# Altium PCB 2017核心板v3.0.PcbDoc (part 2 of 2)
Units mil, origin at the board's own origin, x right, y up, seen from the top; angles counter-clockwise.
Board outline 2660.2 x 2023.11 mil, 2 copper layers (Top Layer, Bottom Layer); 56 components, 128 nets, 399 pads, 43 vias.
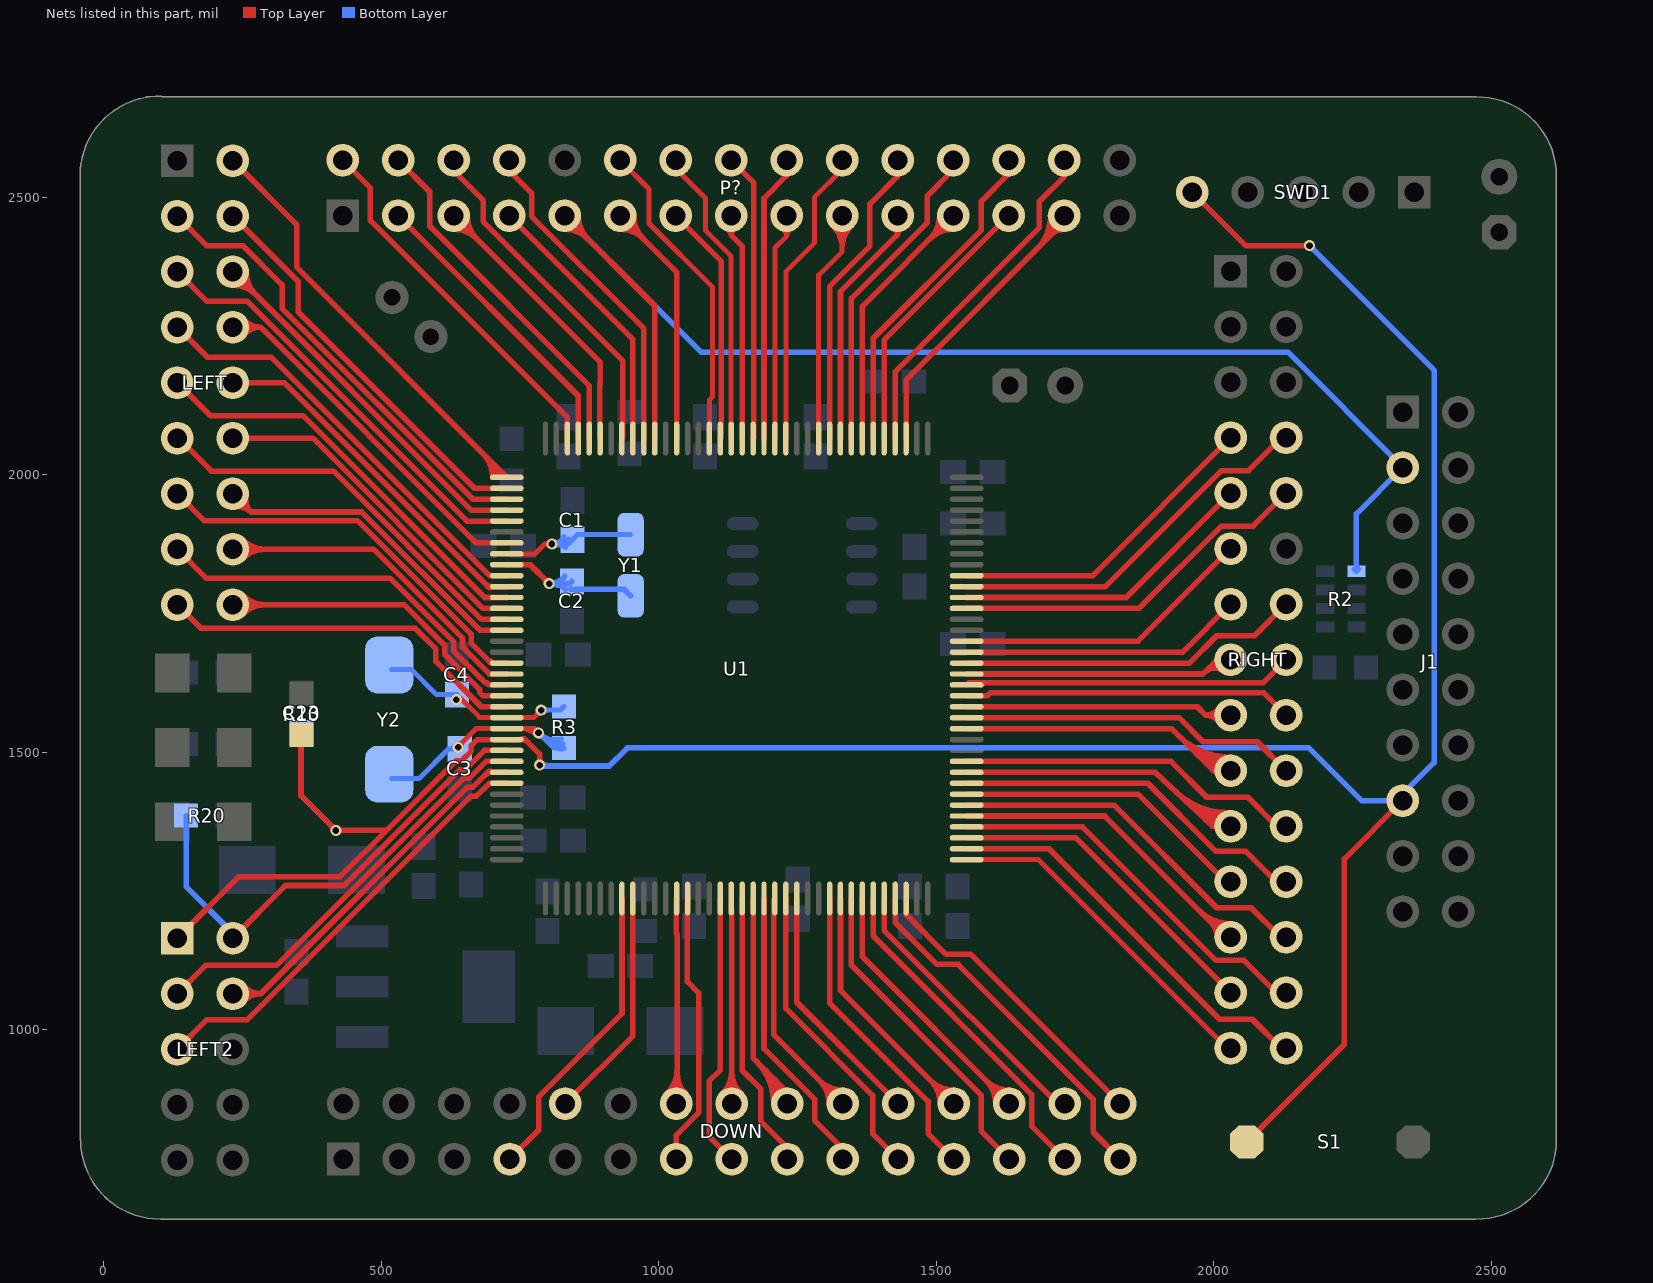
[diagram p2: the nets of this part, all layers, seen from the top]

## Via types
v1: diameter 20, hole 12, Top Layer to Bottom Layer, 43 vias

## Nets (pads, with @x,y where several pads share a name; then routed paths per layer and width w, separated by ;. In a path a pad name is that pad's centre, name@x,y a point inside that pad or via, vN(x,y) a via of type N, cw(c..) or ccw(c..) an arc to the next point about the centre after c; other vN are vias at no path point) (continued)
PB4: J1.3 P?.9 R2.7 U1.134 | length 2556.1
  Top Layer w10: P?.9@830,2442.47 cw(c830,2383.26) 871.87,2425.13 cw(c913.74,2467) P?.9@854.53,2467 ; P?.9@830,2452.47 cw(c830,2417.4) 854.8,2442.2 cw(c879.6,2467) P?.9@844.53,2467 ; P?.9@830,2467 992.36,2304.64 U1.134@992.36,2065.37
  Bottom Layer w10: P?.9@830,2467 1076,2221 2133.29,2221 2340,2014.29 J1.3@2340,2013 2256.61,1929.61 R2.7@2256.61,1826.2 ; R2.7@2253.07,1829.73 ccw(c2244.54,1838.27) 2256.61,1838.27 ccw(c2268.68,1838.27) R2.7@2260.14,1829.73
PB5: P?.8 U1.135 | length 602.2
  Top Layer w10: P?.8@730,2567 730,2548.02 770.51,2507.51 770.51,2465.49 972.68,2263.32 U1.135@972.68,2065.37
PB6: P?.7 U1.136 | length 494
  Top Layer w10: P?.7@730,2467 952.99,2244.01 U1.136@952.99,2065.37
PB7: P?.6 U1.137 | length 628.7
  Top Layer w10: P?.6@630,2567 630,2548.02 683,2495.02 683,2456.71 934.98,2204.72 934.98,2067.05 U1.137@933.31,2065.37
PB8: P?.5 U1.139 | length 659.8
  Top Layer w10: P?.5@630,2442.47 cw(c630,2383.26) 671.87,2425.13 cw(c713.74,2467) P?.5@654.53,2467 ; P?.5@630,2452.47 cw(c630,2417.4) 654.8,2442.2 cw(c679.6,2467) P?.5@644.53,2467 ; P?.5@630,2467 893.94,2203.06 893.94,2163.75 893.02,2162.83 893.02,2066.29 U1.139@893.94,2065.37
PB9: P?.4 U1.140 | length 644.2
  Top Layer w10: P?.4@530,2567 587,2510 587,2448 874.25,2160.75 U1.140@874.25,2065.37
PB10: DOWN.29 U1.69 | length 659.9
  Top Layer w10: U1.69@1425.43,1236.63 1425.43,1193.57 1501,1118 1539,1118 1782.5,874.5 1782.5,815.5 DOWN.29@1831,767
PB11: DOWN.30 U1.70 | length 560.8
  Top Layer w10: U1.70@1445.04,1211.04 ccw(c1451.63,1211.04) 1446.97,1206.38 ; U1.70@1445.12,1236.63 1445.12,1208.23 1517.35,1136 1562,1136 DOWN.30@1831,867
PB12: RIGHT.29 U1.73 | length 614.2
  Top Layer w9: U1.73@1554.37,1306.51 1683.51,1306.51 ; 1684,1306 RIGHT.29@2027,963
PB13: RIGHT.30 U1.74 | length 724.4
  Top Layer w10: U1.74@1554.37,1326.2 1702.8,1326.2 2010,1019 2069,1019 2121,967 RIGHT.30@2130,967
PB14: RIGHT.27 U1.75 | length 591.1
  Top Layer w10: U1.75@1554.37,1345.88 1751.12,1345.88 RIGHT.27@2030,1067
PB15: RIGHT.28 U1.76 | length 699.3
  Top Layer w10: U1.76@1554.37,1365.57 1763.43,1365.57 2004,1125 2054,1125 2112,1067 RIGHT.28@2130,1067
PC0: LEFT2.2 R20.1 U1.26 | length 889.6
  Top Layer w10: LEFT2.2@232,1165 327.02,1260.02 432.2,1260.02 641.08,1468.9 651.09,1468.9 685.55,1503.36 U1.26@725.63,1503.36
  Bottom Layer w10: R20.1@148,1386 148,1258 232,1174 LEFT2.2@232,1165
PC1: LEFT2.3 U1.27 | length 767.1
  Top Layer w10: LEFT2.3@132,1065 183,1116 310.79,1116 647.7,1452.91 657.71,1452.91 688.47,1483.68 U1.27@725.63,1483.68
PC2: LEFT2.4 U1.28 | length 798.8
  Top Layer w10: LEFT2.4@232,1065 282.39,1065 ; LEFT2.4@243.43,1056.04 cw(c261.85,1041.6) 261.85,1065 cw(c261.85,1088.4) LEFT2.4@243.43,1073.96 ; LEFT2.4@251.3,1049.87 cw(c282.39,1025.5) 282.39,1065 ; LEFT2.4@251.3,1080.13 ccw(c282.39,1104.5) 282.39,1065 ; 685.41,1458.01 cw(c700.04,1443.38) U1.28@700.04,1464.07 ; U1.28@700.09,1464.05 ccw(c695.77,1459.61) 691.39,1463.99 ; U1.28@725.63,1463.99 691.39,1463.99 ; 282.39,1065 654.32,1436.93 664.33,1436.93 691.39,1463.99
PC3: LEFT2.5 U1.29 | length 802.9
  Top Layer w10: LEFT2.5@132,965 185,1018 258,1018 660.94,1420.94 670.95,1420.94 694.31,1444.31 U1.29@725.63,1444.31 ; 690.39,1440.39 cw(c700.04,1430.75) U1.29@700.04,1444.39
PC4: DOWN.7 U1.44 | length 553.4
  Top Layer w10: DOWN.7@731,767 783,819 783,879 933.31,1029.31 U1.44@933.31,1236.63
PC5: DOWN.10 U1.45 | length 420.2
  Top Layer w10: DOWN.10@831,867 952.99,988.99 U1.45@952.99,1236.63
PC6: RIGHT.10 U1.96 | length 657.4
  Top Layer w10: U1.96@1554.37,1759.27 1864.98,1759.27 ; 1867.98,1762.27 2013.22,1907.51 2070.51,1907.51 RIGHT.10@2130,1967
PC7: RIGHT.9 U1.97 | length 553.5
  Top Layer w10: U1.97@1554.37,1778.95 1841.95,1778.95 RIGHT.9@2030,1967
PC8: RIGHT.8 U1.98 | length 682.5
  Top Layer w10: U1.98@1554.37,1798.64 1804.35,1798.64 ; 1807.35,1801.64 2013.22,2007.51 2062.51,2007.51 2122,2067 RIGHT.8@2130,2067
PC9: RIGHT.7 U1.99 | length 574.4
  Top Layer w10: U1.99@1554.37,1818.32 1781.32,1818.32 ; 1784.32,1821.32 RIGHT.7@2030,2067
PC10: P?.27 U1.111 | length 690.5
  Top Layer w10: U1.111@1445.12,2065.37 1445.12,2171.12 1730,2456 P?.27@1730,2467 ; 1680.35,2406.35 ccw(c1619.7,2467) P?.27@1705.47,2467 ; 1697.42,2423.42 ccw(c1653.84,2467) P?.27@1715.47,2467 ; 1706.91,2432.91 cw(c1730,2409.81) P?.27@1730,2442.47 ; 1714.49,2440.49 ccw(c1687.99,2467) P?.27@1725.47,2467
PC11: P?.28 U1.112 | length 644.5
  Top Layer w10: U1.112@1425.43,2065.37 1425.43,2185.43 1685,2445 1685,2492 1730,2537 ; P?.28@1725.13,2542.96 cw(c1723.92,2537) 1730,2537 ; P?.28@1730,2567 1730,2537 ; P?.28@1734.87,2542.96 ccw(c1736.08,2537) 1730,2537
PC12: P?.25 U1.113 | length 494.5
  Top Layer w10: U1.113@1405.75,2065.37 1405.75,2242.75 P?.25@1630,2467
PC13: LEFT.8 U1.7 | length 767
  Top Layer w10: LEFT.8@232,2266 282,2266 ; LEFT.8@243.49,2257.11 cw(c261.61,2243.08) 261.61,2266 cw(c261.61,2288.92) LEFT.8@243.49,2274.89 ; LEFT.8@251.4,2250.99 cw(c282,2227.31) 282,2266 ; LEFT.8@251.4,2281.01 ccw(c282,2304.69) 282,2266 ; U1.7@725.63,1877.38 670.62,1877.38 282,2266
PC14: C1.2 U1.8 Y1.2 | length 376.7
  Top Layer w9: U1.8@725.63,1857.69 776.69,1857.69 794.26,1875.26 ; v1@803,1871.49 ccw(c794.26,1863.26) 794.26,1875.26 ; v1@803,1879.03 cw(c794.26,1887.26) 794.26,1875.26 ; v1@810.74,1875.26 v1(807,1875.26) 794.26,1875.26
  Bottom Layer w9: v1@809.97,1879.89 ccw(c816.09,1889.45) 819.03,1878.48 ccw(c821.97,1867.52) v1@811.89,1872.73 ; v1@810.4,1870.93 cw(c819.42,1859.44) C1.2@823.21,1873.56 ; v1@810.89,1871.37 cw(c820.28,1861.98) 820.28,1875.26 cw(c820.28,1888.54) v1@810.89,1879.15 ; v1@816.85,1875.26 cw(c816.85,1854.01) C1.2@831.87,1869.04 ; 821.44,1875.26 ccw(c821.44,1892.23) C1.2@836.68,1884.76 ; C1.2@828.6,1888.72 cw(c807,1899.32) v1(807,1875.26) 836.13,1875.26 C1.2@844,1883.13 852.98,1892.12 Y1.2@949,1892.12
PC15: C2.2 U1.9 Y1.1 | length 356.2
  Top Layer w10: U1.9@725.63,1838.01 767.99,1838.01 v1(802,1804) v1@801.63,1804 ; v1@797,1804 ccw(c784.93,1804) 793.46,1812.54 ccw(c802,1821.07) v1@802,1809
  Bottom Layer w10: v1@804.5,1799.67 cw(c812.91,1785.1) 817.26,1801.35 ; v1@805.54,1800.46 cw(c814.07,1791.93) 814.07,1804 cw(c814.07,1816.07) v1@805.54,1807.54 ; v1@807.38,1804 cw(c807.38,1770.27) C2.2@831.22,1794.12 ; C2.2@830.49,1816.89 cw(c802,1841.93) v1(802,1804) 839.13,1804 C2.2@843,1807.87 ; C2.2@841,1793.87 937.02,1793.87 Y1.1@949,1781.88
PD0: P?.26 U1.114 | length 602.7
  Top Layer w10: U1.114@1386.06,2065.37 1386.06,2246.06 1581,2441 1581,2493 1630,2542 P?.26@1630,2567
PD1: P?.23 U1.115 | length 617.5
  Top Layer w10: U1.115@1366.38,2065.37 1366.38,2303.38 P?.23@1530,2467 ; P?.23@1505.47,2467 cw(c1446.26,2467) 1488.13,2425.13 cw(c1530,2383.26) P?.23@1530,2442.47 ; P?.23@1515.47,2467 cw(c1480.4,2467) 1505.2,2442.2 cw(c1530,2417.4) P?.23@1530,2452.47
PD2: P?.24 U1.116 | length 577.6
  Top Layer w10: U1.116@1346.69,2065.37 1346.69,2317.69 1483,2454 1483,2502 1530,2549 P?.24@1530,2567
PD3: P?.21 U1.117 | length 472.5
  Top Layer w10: U1.117@1327.01,2065.37 1327.01,2330.01 1430,2433 ; P?.21@1422.26,2443.72 cw(c1418.7,2433) 1430,2433 ; P?.21@1430,2467 1430,2433 ; P?.21@1437.74,2443.72 ccw(c1441.3,2433) 1430,2433
PD4: P?.22 U1.118 | length 552.4
  Top Layer w10: U1.118@1307.32,2065.37 1307.32,2339.32 1380,2412 1380,2488 1430,2538 P?.22@1430,2567
PD5: P?.19 U1.119 | length 574.9
  Top Layer w9: U1.119@1287.64,2065.37 1287.64,2359.64 1330,2402 P?.19@1330,2467 ; P?.19@1312.3,2449.3 cw(c1269.58,2406.58) 1330,2406.58 cw(c1390.42,2406.58) P?.19@1347.7,2449.3 ; P?.19@1318.67,2455.67 cw(c1291.31,2428.31) 1330,2428.31 cw(c1368.69,2428.31) P?.19@1341.33,2455.67
PD6: P?.20 U1.122 | length 543.6
  Top Layer w9: U1.122@1228.58,2065.37 1228.58,2365.96 1280,2417.38 1280,2500 1330,2550 P?.20@1330,2567
PD7: P?.17 U1.123 | length 445.7
  Top Layer w9: U1.123@1208.9,2065.37 1208.9,2408.9 1230,2430 ; P?.17@1220.69,2443.77 cw(c1215.17,2430) 1230,2430 ; P?.17@1230,2467 1230,2430 ; P?.17@1239.31,2443.77 ccw(c1244.83,2430) 1230,2430
PD8: RIGHT.25 U1.77 | length 703.7
  Top Layer w10: U1.77@1554.37,1385.25 1802.75,1385.25 2021,1167 RIGHT.25@2030,1167 ; 1972.77,1215.24 ccw(c2030,1272.47) RIGHT.25@2030,1191.53 ; 1989.84,1198.16 ccw(c2030,1238.33) RIGHT.25@2030,1181.53 ; 1994.49,1193.51 cw(c1967.99,1167) RIGHT.25@2005.47,1167
PD9: RIGHT.26 U1.78 | length 674.2
  Top Layer w10: U1.78@1554.37,1404.94 1820.06,1404.94 2005,1220 2067,1220 2120,1167 RIGHT.26@2130,1167
PD10: RIGHT.23 U1.79 | length 540.9
  Top Layer w10: U1.79@1554.37,1424.62 1863.38,1424.62 2021,1267 RIGHT.23@2030,1267
PD11: RIGHT.24 U1.80 | length 649.1
  Top Layer w10: U1.80@1554.37,1444.31 1880.69,1444.31 2003,1322 2057,1322 2112,1267 RIGHT.24@2130,1267
PD12: RIGHT.21 U1.81 | length 854.4
  Top Layer w10: U1.81@1554.37,1463.99 1894.01,1463.99 1997,1367 ; 1931.62,1428.57 ccw(c2025.17,1527.91) RIGHT.21@2029.26,1391.52 ; 1949.19,1412.02 ccw(c2026.2,1493.79) RIGHT.21@2029.56,1381.52 ; 1966.77,1395.47 ccw(c2027.22,1459.66) RIGHT.21@2029.86,1371.53 ; 1984.34,1378.92 ccw(c2028.24,1425.53) RIGHT.21@2030.16,1361.53 ; RIGHT.21@2006.51,1359.93 ccw(c1997,1357.07) 1997,1367 ; RIGHT.21@2006.51,1374.07 cw(c1997,1376.93) 1997,1367 ; RIGHT.21@2030,1367 1997,1367
PD13: RIGHT.22 U1.82 | length 624
  Top Layer w10: U1.82@1554.37,1483.68 1922.32,1483.68 1987,1419 2061,1419 2113,1367 RIGHT.22@2130,1367
PD14: RIGHT.19 U1.85 | length 834
  Top Layer w10: U1.85@1554.37,1542.73 1923.27,1542.73 1999,1467 ; 1935.21,1530.79 ccw(c2030,1625.58) RIGHT.19@2030,1491.53 ; 1952.28,1513.72 ccw(c2030,1591.44) RIGHT.19@2030,1481.53 ; 1969.35,1496.65 ccw(c2030,1557.3) RIGHT.19@2030,1471.53 ; 1986.42,1479.58 ccw(c2030,1523.16) RIGHT.19@2030,1461.53 ; RIGHT.19@2006.13,1461.36 ccw(c1999,1459.67) 1999,1467 ; RIGHT.19@2006.13,1472.64 cw(c1999,1474.33) 1999,1467 ; RIGHT.19@2030,1467 1999,1467
PD15: RIGHT.20 U1.86 | length 615.2
  Top Layer w10: U1.86@1554.37,1562.42 1937.02,1562.42 1980.44,1519 2078,1519 RIGHT.20@2130,1467
PE0: P?.3 U1.141 | length 536.1
  Top Layer w10: P?.3@530,2467 854.57,2142.43 U1.141@854.57,2065.37
PE1: P?.2 U1.142 | length 669.3
  Top Layer w10: P?.2@430,2567 480,2517 480,2458 834.88,2103.12 U1.142@834.88,2065.37
PE2: LEFT.2 U1.1 | length 863.2
  Top Layer w10: LEFT.2@232,2566 347,2451 347,2374.12 U1.1@725.63,1995.49 ; 682.08,2039.04 cw(c638.53,1995.49) U1.1@700.12,1995.49 ; 699.15,2021.97 cw(c672.67,1995.49) U1.1@710.12,1995.49 ; 716.22,2004.9 cw(c706.81,1995.49) U1.1@720.12,1995.49
PE3: LEFT.4 U1.2 | length 728.8
  Top Layer w10: LEFT.4@232,2466 350,2348 350,2293.21 667.41,1975.8 U1.2@725.63,1975.8
PE4: LEFT.3 U1.3 | length 829.7
  Top Layer w10: LEFT.3@132,2466 185,2413 250,2413 321,2342 321,2299.61 664.49,1956.12 U1.3@725.63,1956.12
PE5: LEFT.6 U1.4 | length 819.7
  Top Layer w10: LEFT.6@232,2341.47 cw(c232,2282.26) 273.87,2324.13 cw(c315.74,2366) LEFT.6@256.53,2366 ; LEFT.6@232,2351.47 cw(c232,2316.4) 256.8,2341.2 cw(c281.6,2366) LEFT.6@246.53,2366 ; LEFT.6@232,2366 661.57,1936.43 U1.4@725.63,1936.43
PE6: LEFT.5 U1.5 | length 779.7
  Top Layer w10: LEFT.5@132,2366 185,2313 257.61,2313 653.86,1916.75 U1.5@725.63,1916.75
PE7: DOWN.20 U1.58 | length 569.9
  Top Layer w10: U1.58@1208.9,1236.63 1207,1234.73 1207,991 DOWN.20@1331,867 ; DOWN.20@1306.47,867 ccw(c1247.26,867) 1289.13,908.87 ccw(c1331,950.74) DOWN.20@1331,891.53 ; DOWN.20@1316.47,867 ccw(c1281.4,867) 1306.2,891.8 ccw(c1331,916.6) DOWN.20@1331,881.53
PE8: DOWN.21 U1.59 | length 553.5
  Top Layer w10: U1.59@1228.58,1236.63 1228.58,1038.42 1385,882 1385,813 DOWN.21@1431,767
PE9: DOWN.22 U1.60 | length 445.3
  Top Layer w10: U1.60@1248.27,1236.63 1248.27,1049.73 DOWN.22@1431,867
PE10: DOWN.23 U1.63 | length 562.3
  Top Layer w10: U1.63@1307.32,1236.63 1307.32,1048.68 1485,871 1485,813 DOWN.23@1531,767
PE11: DOWN.24 U1.64 | length 602.2
  Top Layer w10: U1.64@1327.01,1236.63 1327.01,1070.99 DOWN.24@1531,867 ; DOWN.24@1506.47,867 ccw(c1447.26,867) 1489.13,908.87 ccw(c1531,950.74) DOWN.24@1531,891.53 ; DOWN.24@1516.47,867 ccw(c1481.4,867) 1506.2,891.8 ccw(c1531,916.6) DOWN.24@1531,881.53
PE12: DOWN.25 U1.65 | length 587.4
  Top Layer w10: U1.65@1346.69,1236.63 1346.69,1116.31 1581,882 1581,817 DOWN.25@1631,767
PE13: DOWN.26 U1.66 | length 627.3
  Top Layer w10: U1.66@1366.38,1236.63 1366.38,1131.62 DOWN.26@1631,867 ; DOWN.26@1606.47,867 ccw(c1547.26,867) 1589.13,908.87 ccw(c1631,950.74) DOWN.26@1631,891.53 ; DOWN.26@1616.47,867 ccw(c1581.4,867) 1606.2,891.8 ccw(c1631,916.6) DOWN.26@1631,881.53
PE14: DOWN.27 U1.67 | length 612.5
  Top Layer w10: U1.67@1386.06,1236.63 1386.06,1169.23 1671.51,883.78 1671.51,826.49 DOWN.27@1731,767
PE15: DOWN.28 U1.68 | length 512
  Top Layer w10: U1.68@1405.75,1236.63 1405.75,1179.25 1718,867 DOWN.28@1731,867
PF0: LEFT.7 U1.10 | length 789.1
  Top Layer w10: LEFT.7@132,2266 186,2212 301,2212 694.68,1818.32 U1.10@725.63,1818.32 ; 691.02,1821.98 ccw(c700.04,1831) U1.10@700.04,1818.24
PF1: LEFT.10 U1.11 | length 670.6
  Top Layer w10: LEFT.10@232,2166 324.39,2166 691.76,1798.64 ; 686.04,1804.36 ccw(c700.04,1818.36) U1.11@700.04,1798.56 ; U1.11@700.09,1798.58 cw(c695.95,1802.84) 691.76,1798.64 ; U1.11@725.63,1798.64 691.76,1798.64
PF2: LEFT.9 U1.12 | length 754
  Top Layer w10: LEFT.9@132,2166 191.49,2106.51 358.49,2106.51 686.05,1778.95 U1.12@725.63,1778.95
PF3: LEFT.12 U1.13 | length 620.7
  Top Layer w10: LEFT.12@232,2066 376.39,2066 683.13,1759.27 U1.13@725.63,1759.27
PF4: LEFT.11 U1.14 | length 728.8
  Top Layer w10: LEFT.11@132,2066 134,2066 193.49,2006.51 413.28,2006.51 680.21,1739.58 U1.14@725.63,1739.58
PF5: LEFT.14 U1.15 | length 657.8
  Top Layer w10: LEFT.14@232,1966 265.02,1932.98 ; LEFT.14@236.44,1941.88 cw(c242.26,1910.24) 265.01,1932.99 ; LEFT.14@256.12,1961.56 ccw(c287.76,1955.74) 265.01,1932.99 ; U1.15@725.63,1719.9 677.29,1719.9 464.2,1932.98 265.02,1932.98
PF6: LEFT.13 U1.18 | length 748
  Top Layer w10: LEFT.13@132,1966 181,1917 457.58,1917 661.94,1712.64 661.94,1696.14 693.45,1664.62 ; U1.18@700.11,1660.88 ccw(c693.45,1656.83) 693.45,1664.62 ; U1.18@725.63,1660.84 699.25,1660.84 695.47,1664.62 693.45,1664.62 ; 695.38,1662.69 ccw(c700.04,1667.35) 700.04,1660.76 cw(c700.04,1667.35) 695.38,1662.69
PF7: LEFT.16 U1.19 | length 755.2
  Top Layer w10: LEFT.16@232,1866 485.97,1866 645.95,1706.02 645.95,1689.52 694.31,1641.16 U1.19@725.63,1641.16 ; LEFT.16@242.27,1855.73 cw(c267.07,1830.93) 267.07,1866 cw(c267.07,1901.07) LEFT.16@242.27,1876.27 ; LEFT.16@249.34,1848.66 cw(c291.21,1806.79) 291.21,1866 cw(c291.21,1925.21) LEFT.16@249.34,1883.34 ; 690.39,1645.07 ccw(c700.04,1654.72) U1.19@700.04,1641.08
PF8: LEFT.15 U1.20 | length 715.9
  Top Layer w10: LEFT.15@132,1866 184,1814 515.37,1814 629.97,1699.4 629.97,1682.89 687.69,1625.17 689.71,1625.17 ; U1.20@700.05,1621.39 cw(c698.95,1634.41) 689.71,1625.17 ; U1.20@725.63,1621.47 693.41,1621.47 689.71,1625.17
PF9: LEFT.18 U1.21 | length 722.8
  Top Layer w10: LEFT.18@232,1766 540.76,1766 613.98,1692.78 613.98,1676.27 676.97,1613.29 676.97,1607.53 682.72,1601.79 U1.21@725.63,1601.79 ; LEFT.18@242.27,1755.73 cw(c267.07,1730.93) 267.07,1766 cw(c267.07,1801.07) LEFT.18@242.27,1776.27 ; LEFT.18@249.34,1748.66 cw(c291.21,1706.79) 291.21,1766 cw(c291.21,1825.21) LEFT.18@249.34,1783.34
PF10: LEFT.17 U1.22 | length 682.7
  Top Layer w10: LEFT.17@132,1766 174.5,1723.5 560.5,1723.5 598,1686 598,1663.9 679.8,1582.1 U1.22@725.63,1582.1
PF11: DOWN.14 U1.49 | length 519.7
  Top Layer w10: DOWN.14@1013.66,884.34 ccw(c966.88,931.12) 1033.03,931.12 ; DOWN.14@1020.73,877.27 ccw(c991.02,906.98) 1033.03,906.98 ; DOWN.14@1031,867 1033.03,869.03 1033.03,1171.69 1031,1173.72 1031,1235.9 U1.49@1031.73,1236.63 ; 1033.03,897.17 ccw(c1061.17,897.17) DOWN.14@1041.27,877.27 ; 1033.03,921.31 ccw(c1085.31,921.31) DOWN.14@1048.34,884.34
PF12: DOWN.13 U1.50 | length 495.1
  Top Layer w10: DOWN.13@1031,767 1031,809.71 1071.51,850.22 1071.51,1066.49 1051.02,1086.98 1051.02,1236.23 U1.50@1051.42,1236.63
PF13: DOWN.15 U1.53 | length 494.7
  Top Layer w10: U1.53@1110.47,1236.63 1110.47,927.47 1090.49,907.49 1090.49,807.51 DOWN.15@1131,767
PF14: DOWN.16 U1.54 | length 497.5
  Top Layer w10: DOWN.16@1113.66,884.34 ccw(c1071.79,926.21) 1131,926.21 ccw(c1190.21,926.21) DOWN.16@1148.34,884.34 ; DOWN.16@1120.73,877.27 ccw(c1095.93,902.07) 1131,902.07 ccw(c1166.07,902.07) DOWN.16@1141.27,877.27 ; DOWN.16@1131,867 U1.54@1131,1216.38
PF15: DOWN.17 U1.55 | length 503.2
  Top Layer w10: U1.55@1149.84,1236.63 1149.84,927.12 1183,893.96 1183,836 1231,788 DOWN.17@1231,767
PG0: DOWN.18 U1.56 | length 597.2
  Top Layer w10: U1.56@1169.53,1236.63 1169.53,949.47 1231,888 DOWN.18@1231,867 ; 1174.28,944.72 cw(c1096.56,867) DOWN.18@1206.47,867 ; 1191.35,927.65 cw(c1130.7,867) DOWN.18@1216.47,867 ; 1208.42,910.58 cw(c1164.84,867) DOWN.18@1226.47,867
PG1: DOWN.19 U1.57 | length 528.4
  Top Layer w10: U1.57@1189.21,1236.63 1189.21,966.08 1281,874.29 1281,836 1331,786 DOWN.19@1331,767
PG2: RIGHT.17 U1.87 | length 539.8
  Top Layer w10: U1.87@1554.37,1582.1 1969.9,1582.1 1985,1567 ; RIGHT.17@2009.39,1553.71 ccw(c1985,1537.99) 1985,1567 ; RIGHT.17@2009.39,1580.29 cw(c1985,1596.01) 1985,1567 ; RIGHT.17@2030,1567 1985,1567
PG3: RIGHT.18 U1.88 | length 613.8
  Top Layer w10: U1.88@1554.37,1601.79 1591.79,1601.79 1597.51,1607.51 2089.49,1607.51 RIGHT.18@2130,1567 RIGHT.18@2111,1567
PG4: RIGHT.16 U1.89 | length 604.3
  Top Layer w10: U1.89@1554.37,1621.47 1558.07,1625.17 2088.17,1625.17 RIGHT.16@2130,1667 ; U1.89@1579.91,1621.53 cw(c1588.7,1612.73) 1588.7,1625.17
PG5: RIGHT.15 U1.90 | length 580.5
  Top Layer w10: U1.90@1554.37,1641.16 1980.16,1641.16 ; 1991.55,1652.55 cw(c2008.12,1635.99) RIGHT.15@2021.62,1655.13 ; 1999.95,1660.95 cw(c2015.07,1645.84) RIGHT.15@2027.39,1663.3 ; RIGHT.15@2015.86,1646.96 ccw(c2001.17,1626.15) 1983.16,1644.16 2006,1667 RIGHT.15@2030,1667
PG6: RIGHT.14 U1.91 | length 619.6
  Top Layer w10: U1.91@1554.37,1660.84 1955.84,1660.84 2005,1710 2073,1710 RIGHT.14@2130,1767
PG7: RIGHT.13 U1.92 | length 507.2
  Top Layer w10: U1.92@1554.37,1680.53 1943.53,1680.53 ; 1946.53,1683.53 RIGHT.13@2030,1767
PG8: RIGHT.11 U1.93 | length 544.7
  Top Layer w10: U1.93@1554.37,1700.21 1863.21,1700.21 RIGHT.11@2030,1867
PG9: P?.18 U1.124 | length 518.5
  Top Layer w10: U1.124@1189.21,2065.37 1189.21,2498.21 1230,2539 P?.18@1230,2567
PG10: P?.16 U1.125 | length 518.8
  Top Layer w10: P?.16@1130,2567 1170.51,2526.49 1170.51,2066.35 U1.125@1169.53,2065.37
PG11: P?.15 U1.126 | length 440.9
  Top Layer w10: P?.15@1121.63,2443.94 cw(c1117.29,2432) 1130,2432 ; P?.15@1130,2467 1130,2432 ; P?.15@1138.37,2443.94 ccw(c1142.71,2432) 1130,2432 ; U1.126@1149.84,2065.37 1149.84,2412.16 1130,2432
PG12: P?.14 U1.127 | length 543.1
  Top Layer w9: P?.14@1030,2567 1030,2552 1084,2498 1084,2440 1130.16,2393.84 U1.127@1130.16,2065.37
PG13: P?.13 U1.128 | length 436.5
  Top Layer w10: P?.13@1030,2467 1112.27,2384.73 1112.27,2067.17 U1.128@1110.47,2065.37
PG14: P?.12 U1.129 | length 573.2
  Top Layer w9: P?.12@930,2567 982,2515 982,2453 1096.79,2338.21 1096.79,2140.52 1090.79,2134.52 U1.129@1090.79,2065.37
PG15: P?.11 U1.132 | length 591.9
  Top Layer w10: P?.11@930,2442.47 cw(c930,2383.26) 971.87,2425.13 cw(c1013.74,2467) P?.11@954.53,2467 ; P?.11@930,2452.47 cw(c930,2417.4) 954.8,2442.2 cw(c979.6,2467) P?.11@944.53,2467 ; P?.11@930,2467 1031.73,2365.27 U1.132@1031.73,2065.37
PH0: C4.2 R3.2 U1.23 Y2.1 | length 406.5
  Top Layer w9: v1(635,1595) 638,1598 642,1598 676,1564 ; 676,1562.42 U1.23@725.63,1562.42 774.08,1562.42 v1(787.66,1576) ; v1@782.16,1576 cw(c768.88,1576) 778.27,1566.61 cw(c787.66,1557.22) v1@787.66,1570.5
  Bottom Layer w9: Y2.1@518,1649.43 553.57,1649.43 598.87,1604.13 C4.2@636,1604.13 C4.2@636,1602.17 ; v1(635,1595) 638,1598 C4.2@642,1598 ; v1(787.66,1576) 822.2,1576 R3.2@829,1582.8 ; v1@791.55,1572.11 cw(c800.94,1562.72) 800.94,1576 cw(c800.94,1589.28) v1@791.55,1579.89
PH1: C3.2 R3.1 U1.24 Y2.2 | length 603.6
  Top Layer w9: v1(638,1509) 640.27,1509 641,1509.73 641,1513.32 670.41,1542.73 U1.24@725.63,1542.73 775.27,1542.73 ; v1@638,1514.5 ccw(c638,1524.59) 645.14,1517.46 ; v1@643.5,1509 cw(c659.96,1509) 648.32,1520.64 ; U1.24@751.06,1542.73 cw(c751.06,1503.06) v1@779.11,1531.11 ; 772.78,1542.73 cw(c772.78,1524.78) v1@785.47,1537.47 ; v1@777.56,1535.8 ccw(c769.53,1536.99) 775.27,1542.73 ; v1@782.2,1540.44 cw(c781.01,1548.47) 775.27,1542.73 ; v1@785,1533 v1(783,1535) 775.27,1542.73
  Bottom Layer w9: Y2.2@518,1452.57 567.57,1452.57 C3.2@620.87,1505.87 ; C3.2@633.58,1512.27 cw(c620.87,1521.68) C3.2@620.87,1505.87 ; v1(638,1509) 638,1508.87 C3.2@641,1505.87 ; C3.2@641,1511.73 C3.2@641,1505.87 ; v1@783,1529.5 cw(c783,1516.22) 792.39,1525.61 cw(c801.78,1535) v1@788.5,1535 ; 793.74,1524.26 ccw(c817.34,1547.86) R3.1@826.71,1515.83 ; 804.48,1513.52 ccw(c822.2,1531.24) R3.1@829.24,1507.19 ; R3.1@824.18,1524.46 cw(c812.48,1564.48) v1(783,1535) 810,1508 R3.1@829,1508 ; C3.2@620.87,1505.87 C3.2@641,1505.87
RESET: C23.2 J1.15 LEFT2.1 R10.1 S1.1 SWD1.5 U1.25 | length 5187.2
  Top Layer w10: LEFT2.1@132,1165 243,1276 425.58,1276 508.79,1359.21 ; R10.1@356,1531 355,1530 355,1422 v1(417.79,1359.21) 508.79,1359.21 ; v1@412.79,1359.21 ccw(c400.72,1359.21) 409.25,1367.75 ccw(c417.79,1376.28) v1@417.79,1364.21 ; v1@421.33,1355.67 cw(c429.86,1347.14) 429.86,1359.21 cw(c429.86,1371.28) v1@421.33,1362.75 ; U1.25@751.17,1523.1 cw(c755.03,1519.12) 758.95,1523.05 ; U1.25@751.22,1523.13 cw(c751.22,1504.65) 764.29,1517.71 ; v1@781.46,1480.54 ccw(c772.93,1489.07) 785,1489.07 ccw(c797.07,1489.07) v1@788.54,1480.54 ; v1(785,1477) 785,1497 758.95,1523.05 ; SWD1.5@1961,2509 2057,2413 v1(2172,2413) ; S1.1@2059,798 2235,974 2235,1308 J1.15@2340,1413 ; v1@2168.46,2409.46 ccw(c2159.93,2400.93) 2159.93,2413 ccw(c2159.93,2425.07) v1@2168.46,2416.54 ; 508.79,1359.21 634.46,1484.88 644.46,1484.88 661.98,1502.4 661.98,1512.41 672.63,1523.05 U1.25@725.63,1523.05 758.95,1523.05
  Bottom Layer w10: C23.2@356,1534.94 355,1533.94 355,1422 v1(417.79,1359.21) ; v1@412.79,1359.21 ccw(c400.72,1359.21) 409.25,1367.75 ccw(c417.79,1376.28) v1@417.79,1364.21 ; v1(785,1477) 786.64,1475.36 910.36,1475.36 943,1508 2171,1508 2266,1413 J1.15@2340,1413 2340,1425 2396.5,1481.5 2396.5,2188.5 v1(2172,2413) ; v1@788.54,1480.54 ccw(c801.03,1493.03) 801.03,1475.36 ; v1@2172,2408 cw(c2172,2395.93) 2180.54,2404.46 cw(c2189.07,2413) v1@2177,2413
pads on no net: ?.8 J1.11 J1.17 J1.19 LEFT.1 P?.1 RIGHT.12 U1.107
copper on no net: | length 1129.7
  Bottom Layer w9: 427,1447.05 ccw(c487.47,1447.05) 444.71,1404.29 ccw(c515.42,1475) 515.42,1375 603,1375 613.5,1375 634.5,1375 645,1375 ccw(c645,1403.97) 665.49,1383.49 696.34,1414.34 ccw(c625.63,1485.05) 725.63,1485.05 725.63,1606.95 ccw(c625.63,1606.95) 696.34,1677.66 671.29,1702.71 ccw(c600.58,1632) 600.58,1732 528.42,1732 ccw(c528.42,1632) 457.71,1702.71 456.29,1701.29 ccw(c527,1630.58) 427,1630.58 427,1447.05

## Polygon pours and split planes (outlines as drawn)
GND on Bottom Layer "Bottom Layer-No Net" (solid, remove dead copper, pour order 2): 421,1778 440,1757.63 747,1757.63 747,1365.9 742.43,1361 403,1361
GND on Bottom Layer "Bottom Layer-No Net" (hatched 90Degree grid 20 track 8, remove dead copper, pour order 7): -282,3067 -277,3062 4120,3062 4120,1136 3159,175 2872,462 -495,462
GND on Top Layer "Bottom Layer-No Net" (hatched 90Degree grid 20 track 8, remove dead copper, pour order 9): -386,3062 3299,3062 3733,2628 3072,1967 3072,218 -129,218 -360,449

## Keep-outs
Keep-Out Layer:
  lines w10: -38.08,2537.5 cw(c99.61,2539.32) 102,2677 ; -38,804 -38,2537.5 ; -37,804 ccw(c100.68,801.61) 102.5,663.92 ; 17.02,2717 16.98,2737 ; 76.97,2747.09 17,2727 ; 77.03,2707.09 17,2727 ; 78,2676 2476,2676 ; 102.42,664 2476,664 ; 918.62,2728.39 17,2727 ; 1710.38,2729.61 2612,2731 ; 2472,664 ccw(c2474.39,801.68) 2612.08,803.5 ; 2472.5,2676.08 cw(c2474.32,2538.39) 2612,2536 2612,800 ; 2551.97,2750.91 2612,2731 ; 2552.03,2710.91 2612,2731 ; 2612.02,2721 2611.98,2741 ; 2677.01,705.91 2697.01,645.91 ; 2677.01,2597.91 2697.01,2657.91 ; 2687.01,645.91 2707.01,645.91 ; 2687.01,2657.91 2707.01,2657.91 ; 2697.01,1375.99 2697.01,645.91 ; 2697.01,1927.82 2697.01,2657.91 ; 2717.01,705.91 2697.01,645.91 ; 2717.01,2597.91 2697.01,2657.91
  text "2595.003 (mil)" at 928.68,2692.41 h60 r0.09
  text "2012 (mil)" at 2733,1385.99 h60 r90

## Silkscreen, mask and mechanical layers (free items; w line width, h text height)
Top Overlay:
  text "B9" at 547,2615 h30 r90
  text "RST" at 1910,2583 h30
  text "G" at 2041,2583 h30
  text "A14" at 2106,2583 h30
  text "3V3" at 2347,2583 h30
  text "A13" at 2224,2582 h30
  text "E2" at 298,2548 h30
  text "E4" at -6,2446 h30
  text "E3" at 298,2442 h30
  text "E1" at 550,2360 h30 r90
  text "L" at 473,2352 h30 r45
  text "B3" at 848,2350 h30 r90
  text "A13" at 1881,2350 h30
  text "A12" at 2192,2350 h30
  text "B7" at 648,2349 h30 r90
  text "B5" at 750,2349 h30 r90
  text "E6" at -6,2347 h30
  text "E5" at 298,2345 h30
  text "D0" at 1650,2343 h30 r90
  text "G9" at 1255,2342 h30 r90
  text "D6" at 1352,2342 h30 r90
  text "D4" at 1452,2340 h30 r90
  text "D2" at 1549,2340 h30 r90
  text "C11" at 1748,2329 h30 r90
  text "G" at 2505,2328 h30
  text "G14" at 952,2324 h30 r90
  text "G10" at 1158,2323 h30 r90
  text "G12" at 1054,2322 h30 r90
  text "A15" at 1844,2318 h30 r90
  text "A11" at 1891,2252 h30
  text "B4" at 848,2251 h30 r90
  text "B8" at 648,2250 h30 r90
  text "B6" at 750,2250 h30 r90
  text "A10" at 2193,2250 h30
  text "C13" at 298,2249 h30
  text "E0" at 551,2249 h30 r90
  text "F0" at -6,2248 h30
  text "D7" at 1255,2243 h30 r90
  text "D5" at 1352,2243 h30 r90
  text "C12" at 1650,2243 h30 r90
  text "D3" at 1452,2241 h30 r90
  text "D1" at 1549,2241 h30 r90
  text "C10" at 1748,2230 h30 r90
  text "A14" at 1845,2223 h30 r90
  text "G15" at 952,2211 h30 r90
  text "G11" at 1158,2210 h30 r90
  text "G13" at 1054,2209 h30 r90
  text "H" at 639,2182 h30 r45
  text "F2" at -6,2150 h30
  text "F1" at 298,2145 h30
  text "A9" at 1814,2141 h30
  text "A8" at 1905.99,2141 h30
  text "C9" at 1813,2049 h30
  text "C8" at 1905.99,2049 h30
  text "F4" at -6,2047 h30
  text "F3" at 298,2042 h30
  text "F6" at -6,1948 h30
  text "C7" at 1816,1946 h30
  text "C6" at 1905.99,1946 h30
  text "F5" at 298,1945 h30
  text "F7" at 298,1847 h30
  text "F8" at -6,1844 h30
  text "G8" at 1819,1843 h30
  text "F10" at -24,1747 h30
  text "F9" at 298,1745 h30
  text "G7" at 1821,1742 h30
  text "G6" at 1905.99,1742 h30
  text "G5" at 1820,1644.84 h30
  text "G4" at 1905.99,1644.84 h30
  text "G2" at 1819,1554 h30
  text "G3" at 1905.99,1554 h30
  text "D14" at 1790,1452 h30
  text "D15" at 1881,1452 h30
  text "D12" at 1788,1348 h30
  text "D13" at 1881,1348 h30
  text "D10" at 1792,1244 h30
  text "D11" at 1891,1244 h30
  text "C0" at 298,1149 h30
  text "D8" at 1820,1148 h30
  text "D9" at 1905.99,1148 h30
  text "RST" at -17,1147 h30
  text "BUPT Robot" at 883,1129 h60
  text "C1" at 19.33,1048 h30
  text "B11" at 1844,1048 h30 r90
  text "B14" at 1881,1048 h30
  text "B15" at 2185,1047 h30
  text "C2" at 297.7,1041.98 h30
  text "5V" at 454,1019 h30 r90
  text "3V3" at 552,1019 h30 r90
  text "A5" at 648,1019 h30 r90
  text "A7" at 748,1019 h30 r90
  text "C5" at 849,1019 h30 r90
  text "B1" at 960,1019 h30 r90
  text "F11" at 1052,1019 h30 r90
  text "F14" at 1150,1019 h30 r90
  text "G0" at 1237,1019 h30 r90
  text "E7" at 1338,1019 h30 r90
  text "E9" at 1448,1019 h30 r90
  text "E11" at 1546,1019 h30 r90
  text "E13" at 1644,1019 h30 r90
  text "E15" at 1741,1019 h30 r90
  text "B12" at 1881,950 h30
  text "C3" at 6,948 h30
  text "B13" at 2189,946 h30
  text "3V3" at 298,945 h30
  text "F12" at 1052,935 h30 r90
  text "F15" at 1243,935 h30 r90
  text "F13" at 1150,934 h30 r90
  text "G" at 454,933 h30 r90
  text "G1" at 1340,933 h30 r90
  text "A6" at 648,932 h30 r90
  text "C4" at 748,932 h30 r90
  text "E14" at 1744,931 h30 r90
  text "B10" at 1847,931 h30 r90
  text "A4" at 552,930 h30 r90
  text "E8" at 1450,930 h30 r90
  text "B0" at 849,929 h30 r90
  text "BT1" at 960,929 h30 r90
  text "E10" at 1549,929 h30 r90
  text "E12" at 1647,929 h30 r90
  text "A1" at 298,851 h30
  text "A0" at 6,848 h30
  text "A2" at 6,752 h30
  text "A3" at 297,746 h30